# Altium PCB STM32_DAQ_Control_Board.PcbDoc (part 1 of 2)
Units mil, origin at the board's own origin, x right, y up, seen from the top; angles counter-clockwise.
Board outline 2345 x 2362.2 mil, 2 copper layers (Top Layer, Bottom Layer); 78 components, 52 nets, 252 pads, 148 vias.
Unrouted connection lines stored in the file: 1.
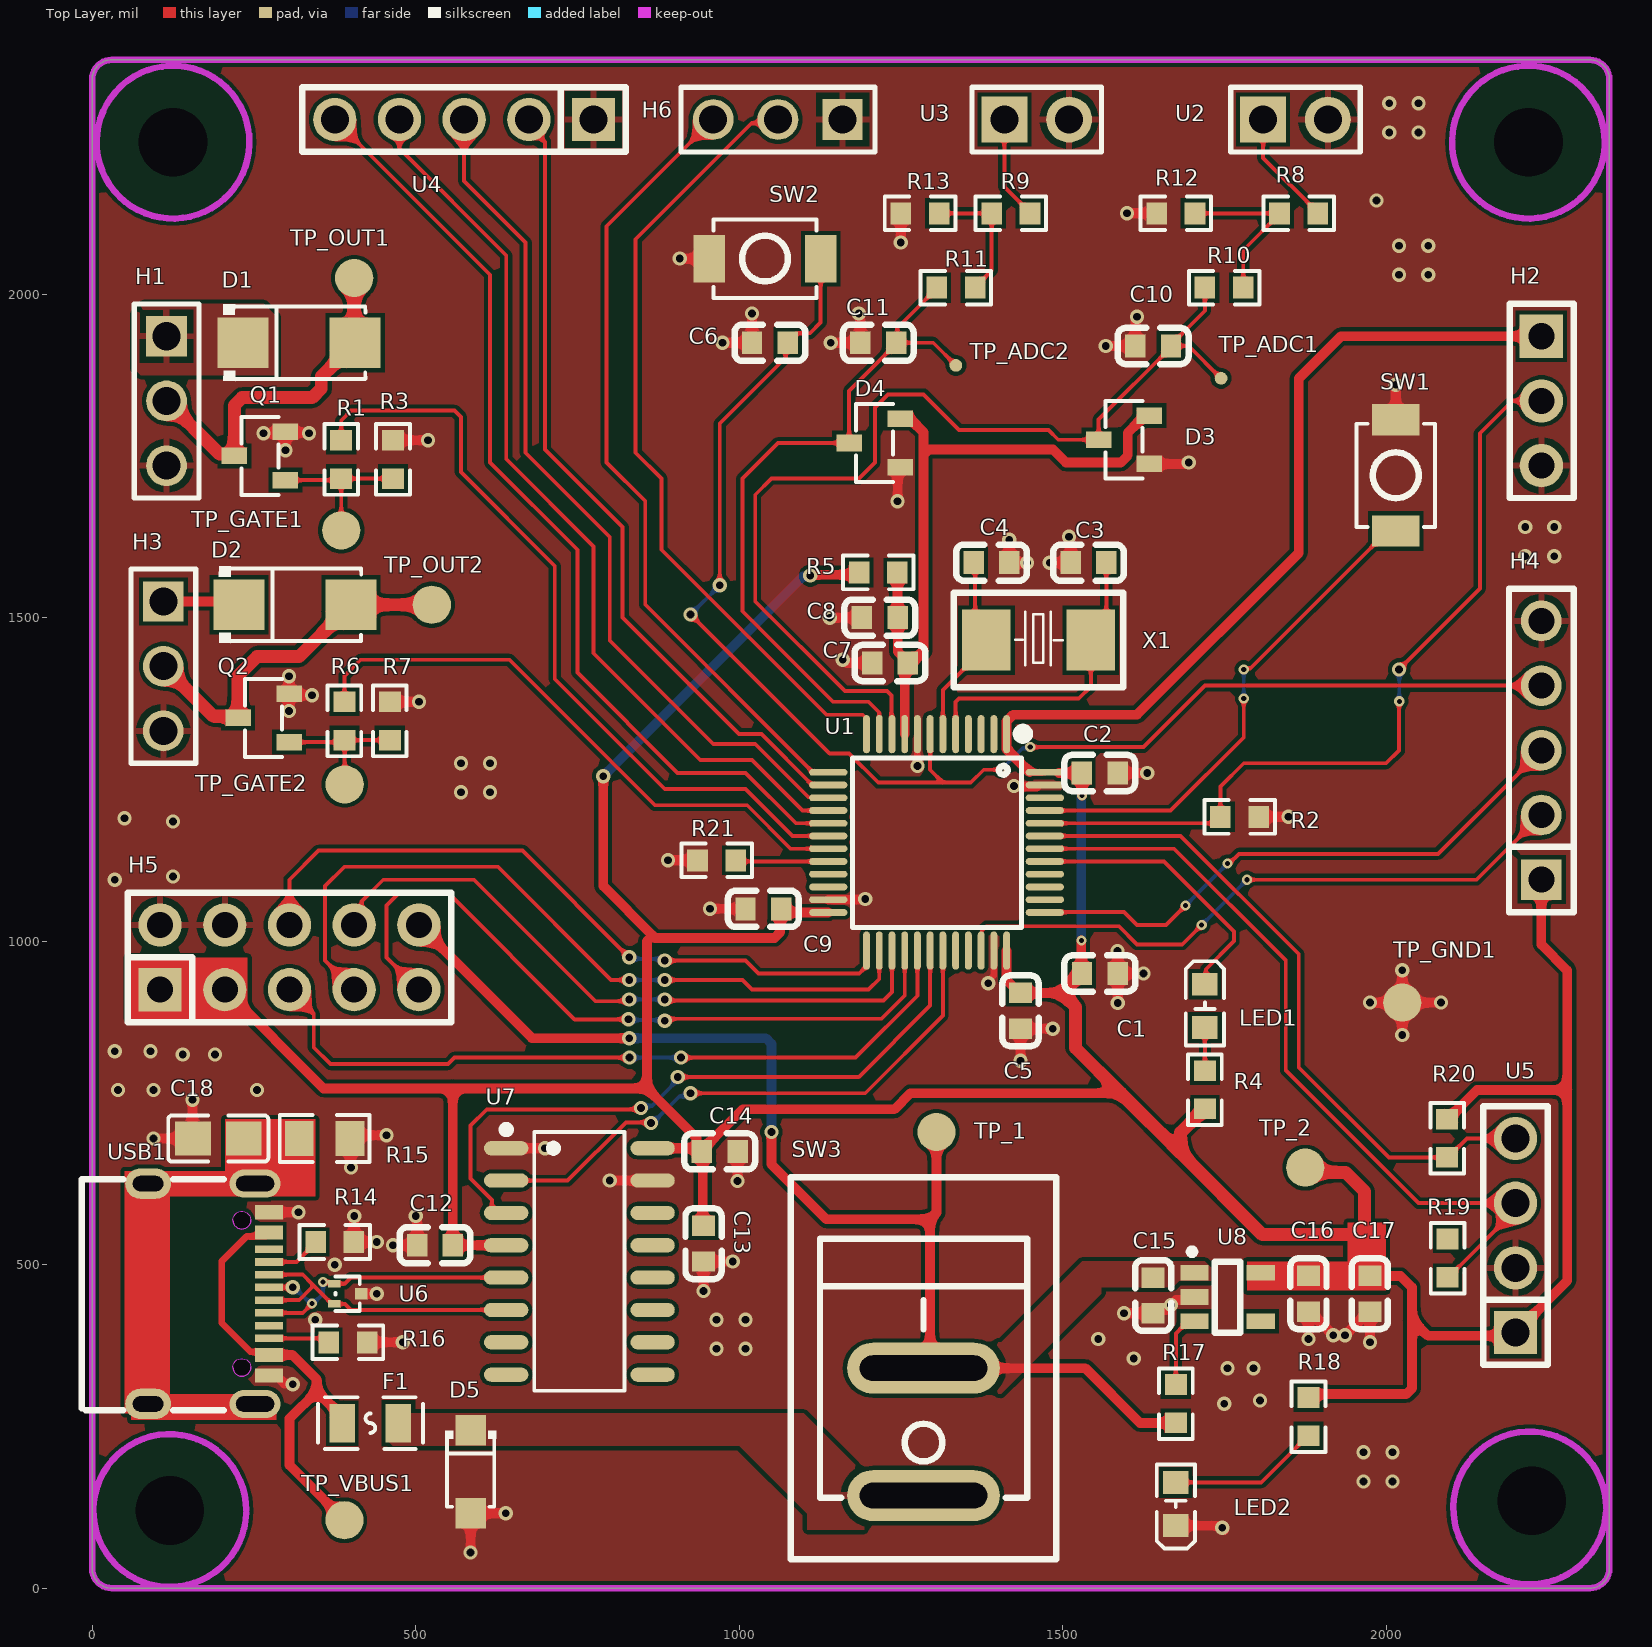
[diagram p0: Top Layer view]
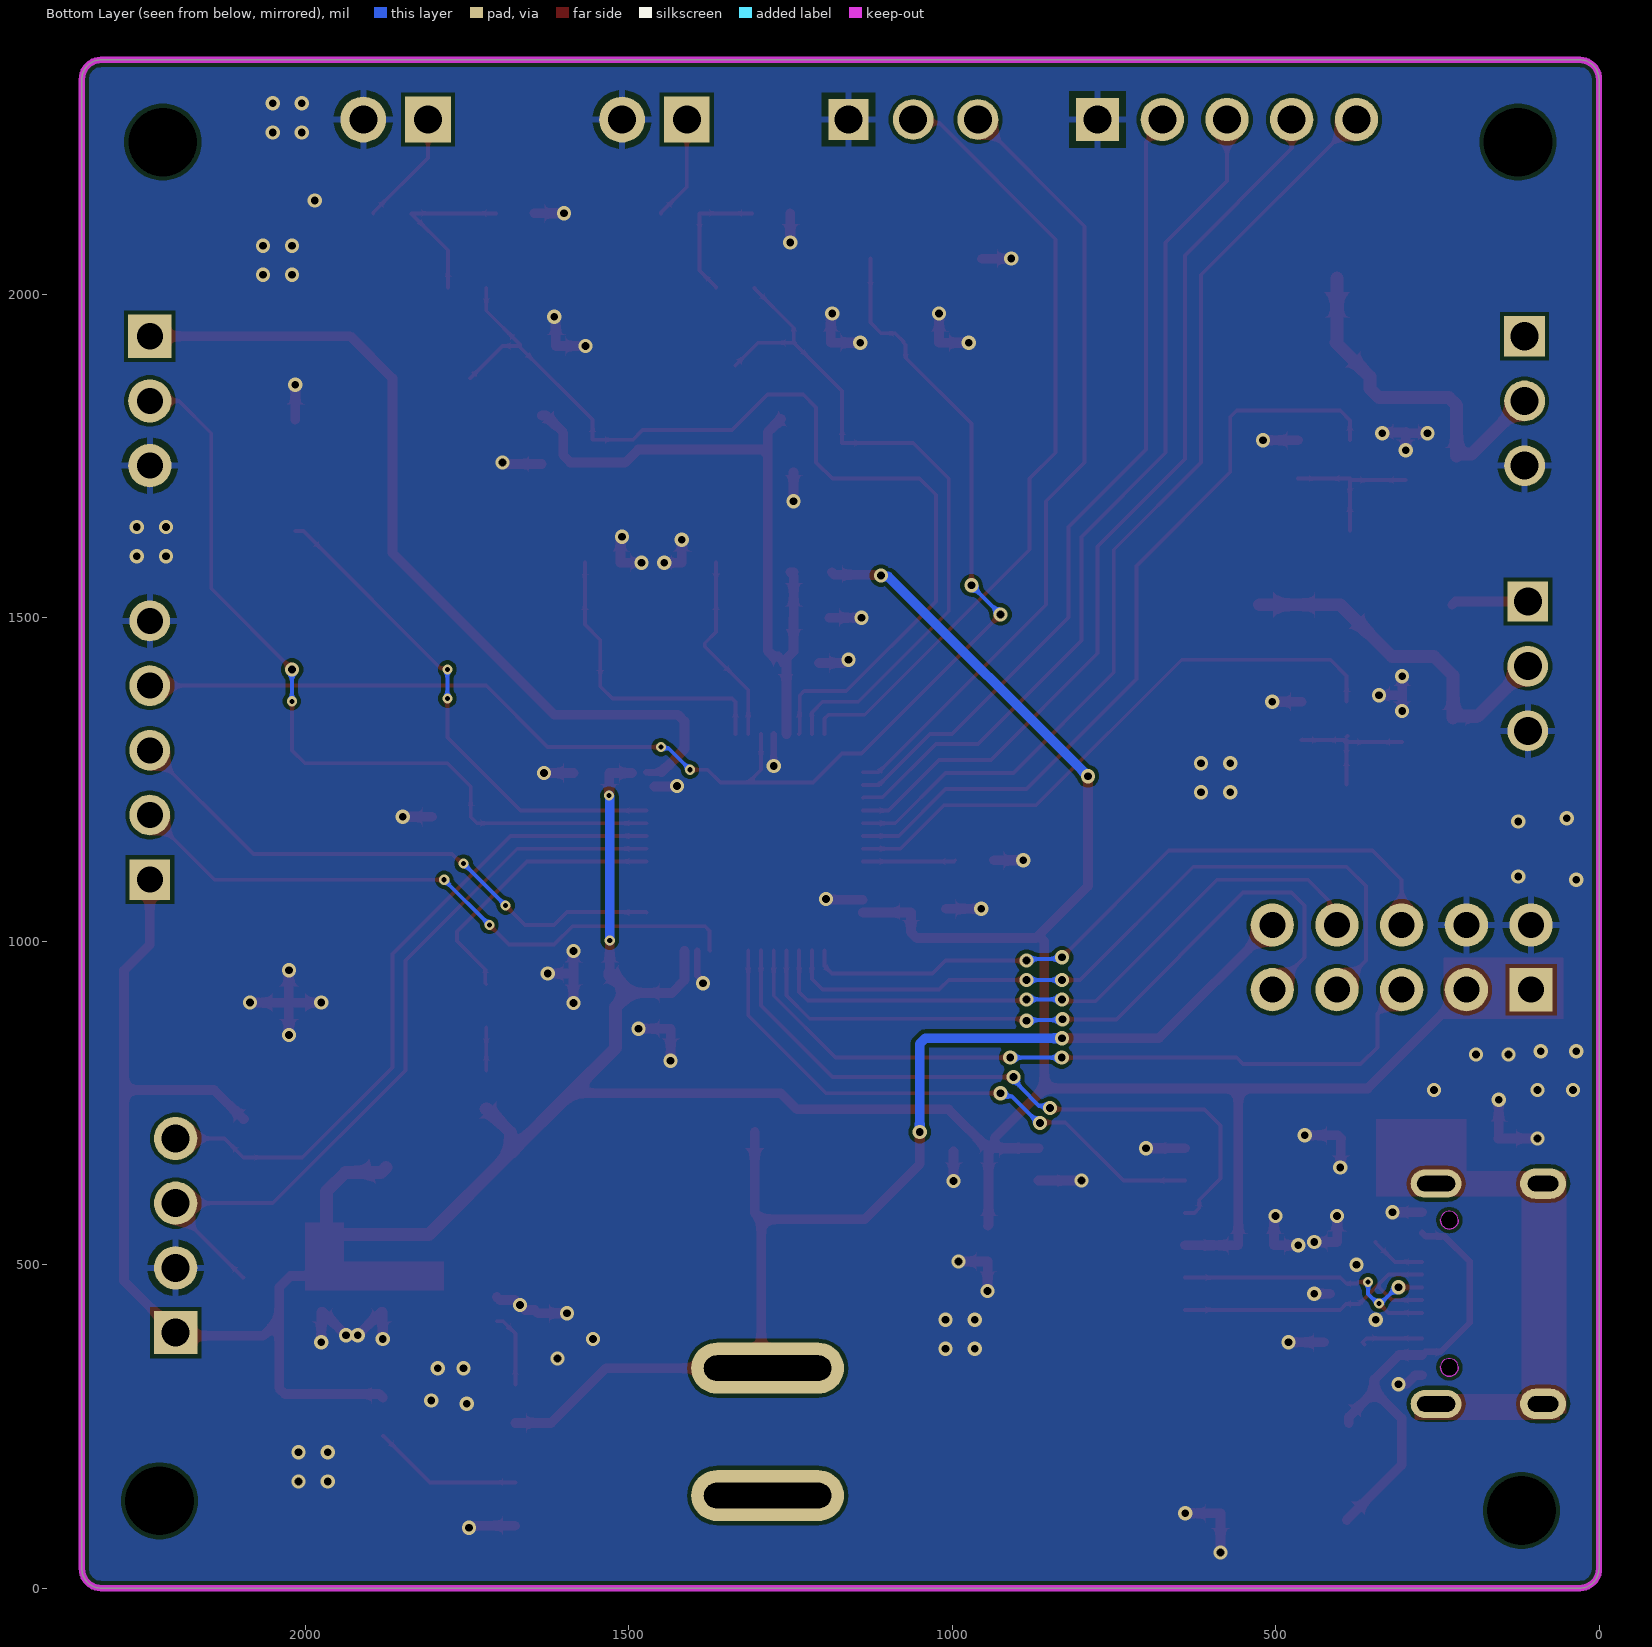
[diagram p1: Bottom Layer view, seen from below]

## Layer stack, top to bottom
Top Solder: solder mask 0.4, Solder Resist, Dk 3.5
Top Layer: signal copper 1.4
Dielectric 1: dielectric 12.6, FR-4, Dk 4.8
Bottom Layer: signal copper 1.4
Bottom Solder: solder mask 0.4, Solder Resist, Dk 3.5

## Board outline
0,30 0,2332.2 cw(c30,2332.2) 30,2362.2 2315,2362.2 cw(c2315,2332.2) 2345,2332.2 2345,30 cw(c2315,30) 2315,0 30,0 cw(c30,30)

## Design rules (kind name [scope] priority, off if disabled: settings)
Clearance [All] p1: gap=6 ignorepadtopadclearanceinfootprint=TRUE
HoleSize [All] p1: absolutevalues=TRUE maxlimit=196.85 minlimit=1 maxpercent=80.000 minpercent=20.000
NetAntennae [All] p1: netantennaetolerance=100
PlaneConnect [All] p1: planeconnectstyle=Direct reliefexpansion=20 reliefentries=4 reliefconductorwidth=10 reliefairgap=10
PolygonConnect [All] p1: thpad.connectstyle=Relief thpad.reliefconductorwidth=10 thpad.reliefentries=4 thpad.polygonreliefangle="90 Angle" thpad.airgapwidth=10 smdpad.connectstyle=Direct smdpad.reliefconductorwidth=10 smdpad.reliefentries=4 smdpad.polygonreliefangle="90 Angle" smdpad.airgapwidth=10 via.connectstyle=Direct via.reliefconductorwidth=10 via.reliefentries=4 via.polygonreliefangle="90 Angle" via.airgapwidth=10
RoutingVias [All] p1: holewidth=12 width=22 viastyle="Through Hole" minholewidth=7.87 minwidth=15.75 maxholewidth=196.85 maxwidth=196.85
SilkToSilkClearance [All] p1: silktosilkclearance=2
SilkToSolderMaskClearance [IsPad] p1: minsilkscreentomaskgap=2 clearancetoexposedcopper=TRUE
SolderMaskExpansion SolderMask_Via_Tented [IsVia] p1: expansion=4 istentingtop=TRUE
SolderMaskExpansion [All] p2: expansion=4 istentingtop=FALSE useseparateexpansions=TRUE expansionbottom=4 istentingbottom=FALSE
Width PWR [InNetClass('PWR')] p1: maxlimit=60 minlimit=15 preferedwidth=15
Width [All] p2: maxlimit=100 minlimit=5 preferedwidth=6 minimp=50.000000 maximp=50.000000 favimp=50.000000
25 further rules are at their usual default settings.

## Classes and differential pairs
net class PWR: 3.3V +5V_SYS SHIELD VBUS_FUSED VDDA_3V3 VLOAD_EXT1 VLOAD_EXT2

## Components (designator, comment, footprint, x,y, rotation, side; value= is the part's Value field where it differs from the comment)
C1 "4.7uf" C0603 1557.6,950 r180 top
C2 "100nF" C0603 1557.4,1260 r0 top
C3 "5.1pF" C0603 1540,1585 r0 top value=10pf
C4 "5.1pF" C0603 1390,1585 r180 top value=10pf
C5 "100nF" C0603 1435,892.4 r270 top
C6 "100nF" C0603 1047.6,1925 r0 top
C7 "100nf" C0603 1233.2,1430 r0 top
C8 "1uf" C0603 1217.4,1500 r0 top
C9 "100nF" C0603 1037.4,1050 r0 top
C10 "10nF" C0603 1640,1920 r0 top
C11 "10nF" C0603 1215,1925 r0 top
C12 "100nF" C0603 530,530 r0 top
C13 "1uf" C0603 945,532.4 r90 top
C14 "100nF" C0603 970,675 r180 top
C15 "1uf" C0603 1640,452.4 r270 top
C16 "1uf" C0603 1880,455 r270 top
C17 "4.7uf" C0603 1975,455 r270 top
C18 "1nF" C0805 195,695 r0 top
D1 "SS14" SMA_L4.3-W2.6-LS5.2-RD 320,1925 r0 top
D2 "SS14" SMA_L4.3-W2.6-LS5.2-RD 313.4,1520 r0 top
D3 "BAT54S" SOT-23-3_L2.9-W1.3-P1.90-LS2.4-BR 1595,1775 r0 top
D4 "BAT54S" SOT-23-3_L2.9-W1.3-P1.90-LS2.4-BR 1209.4,1770 r0 top
D5 "SMF5.0A" SOD-123FL_L2.7-W1.8-LS3.8-RD 585,180 r270 top
F1 "SMD0805-050-6" F0805 430,255 r180 top
H1 "2.54-1*3P针" HDR-TH_3P-P2.54-V-M-1 115,1835 r270 top
H2 "HX PZ2.54-1x3P ZZ" CONN-TH_HX-PZ2.54-1X3P-ZZ 2240,1835 r270 top
H3 "2.54-1*3P针" HDR-TH_3P-P2.54-V-M-1 110,1425 r270 top
H4 "PH2.54-1X5P-H25" HDR-TH_5P-P2.54-V-M-3 2240,1295 r90 top
H5 "PZ2.54-2X5P-H25" HDR-TH_10P-P2.54-V-M-R2-C5-S2.54_2 305,975 r0 top
H6 "2.54-1*3P针" HDR-TH_3P-P2.54-V-M-1 1060,2270 r180 top
LED1 "GL0603UR01" LED0603-FD 1720,900 r90 top
LED2 "GL0603UR01" LED0603-FD 1675,130 r270 top
Q1 "AO3400A" SOT-23-3_L2.9-W1.3-P1.90-LS2.4-BR 259.4,1750 r0 top
Q2 "AO3400A" SOT-23-3_L2.9-W1.3-P1.90-LS2.4-BR 265,1345 r0 top
R1 "100欧" R0603 385,1744.7 r270 top
R2 "10K" R0603 1773.57,1192.19 r0 top
R3 "100k" R0603 465,1744.7 r270 top
R4 "1k" R0603 1720,770.4 r270 top value=10K
R5 "0欧" R0603 1215,1570 r0 top
R6 "100欧" R0603 390,1340.4 r270 top
R7 "100k" R0603 460,1340.4 r270 top
R8 "12K" R0603 1865,2125 r180 top value=10K
R9 "12K" R0603 1420,2125 r180 top value=10K
R10 "330欧" R0603 1749.6,2010 r0 top
R11 "330欧" R0603 1335,2010 r0 top
R12 "18K" R0603 1675,2125 r180 top
R13 "18K" R0603 1279.7,2125 r180 top
R14 "5.1k" R0603 375,535 r180 top
R15 "1MΩ" R0805 359.4,695 r180 top
R16 "5.1k" R0603 395.4,380 r180 top
R17 "10K" R0603 1675,285 r90 top
R18 "1K" R0603 1880,265 r90 top
R19 "4.7k" R0603 2095,510 r90 top value=0欧
R20 "4.7k" R0603 2094.4,695.3 r90 top value=0欧
R21 "10K" R0603 965.3,1125 r0 top value=0欧
SW1 "TS-1088-AR02016" SW-SMD_L3.9-W3.0-P4.45 2015,1720 r90 top
SW2 "TS-1088-AR02016" SW-SMD_L3.9-W3.0-P4.45 1040,2055 r0 top
SW3 "RS601HL-1010011BB" SW-TH_RS601HL-1010011BB 1285,241.6 r90 top
TP_1 "" Test-Point-0.5mm#1 1305,705 r90 top
TP_2 "" Test-Point-0.5mm#1 1875,650 r90 top
TP_ADC1 "" Test-Point-0.5mm#2 1745,1870 r90 top
TP_ADC2 "" Test-Point-0.5mm#2 1335,1890 r90 top
TP_GATE1 "" Test-Point-0.5mm#1 385,1635 r90 top
TP_GATE2 "" Test-Point-0.5mm#1 390.34,1242.26 r90 top
TP_GND1 "" Test-Point-0.5mm#1 2025,905 r90 top
TP_OUT1 "" Test-Point-0.5mm#1 405,2025 r90 top
TP_OUT2 "" Test-Point-0.5mm#1 525,1520 r90 top
TP_VBUS1 "" Test-Point-0.5mm#1 390,105 r90 top
U1 "STM32F103C8T6" LQFP-48_L7.0-W7.0-P0.50-LS9.0-BL 1305.2,1152.7 r180 top
U2 "HX PZ2.54-1x2P ZZ" HDR-TH_2P-P2.54-V-M-3 1860,2270 r0 top
U3 "HX PZ2.54-1x2P ZZ" HDR-TH_2P-P2.54-V-M-3 1460,2270 r0 top
U4 "HX PZ2.54-1x5P" HDR-TH_5P-P2.54-V-M 575,2270 r180 top
U5 "HX PZ2.54-1x4P" HDR-TH_4P-P2.54-V-M 2200,545 r90 top
U6 "TPD2EUSB30DRTR-N" SOT-723_L1.2-W0.8-P0.40-LS1.2-BR 395,455 r180 top
U7 "CH340C" SOP-16_L10.0-W3.9-P1.27-LS6.0-BL 753.1,505 r270 top
U8 "AP2112K-3.3TRG1" SOT-25-5_L2.9-W1.6-P0.95-LS2.8-BL 1755,450 r270 top
USB1 "TYPE-C 16PIN 2MD(073)" USB-C-SMD_TYPE-C-16PIN-2MD-073 180,455 r270 top
X1 "8MHz" CRYSTAL-SMD_L5.0-W3.2 1462.98,1465.41 r180 top

## Footprints (in the part's own frame and the unit in brackets; to place one, negate y for a bottom-side part, rotate by r counter-clockwise, add the part's x,y. Pads: shape width x height; smd on the part's side, far side on the other; paste and mask are expansions set on the pad)
C0603 [mil]
  rect 31.5x35.4 smd: 1(-27.6,0) 2(27.6,0)
  silkscreen extent -55,-28 55,28
C0805 [mil]
  rect 55.5x53.1 smd paste-3937 mask+2: 1(-39.4,0) 2(39.3,0)
  silkscreen extent -77,-36 77,36
CONN-TH_HX-PZ2.54-1X3P-ZZ [mil]
  rect 66.9x66.9 hole 40.2: 1(-100,0)
  round 66.9 hole 40.2: 2(0,0) 3(100,0)
  silkscreen extent -150,-49 150,50
CRYSTAL-SMD_L5.0-W3.2 [mil]
  rect 74.8x94.5 smd: 1(-80.7,0) 2(80.7,0)
  silkscreen extent -131,-73 131,73
F0805 [mil]
  rect 39.4x59.1 smd paste-3937 mask+2: 1(-43.4,0) 2(43.3,0)
  silkscreen extent -81,-40 81,40
HDR-TH_2P-P2.54-V-M-3 [mil]
  rect 70.9x70.9 hole 43.3: 1(-50,0)
  round 70.9 hole 43.3: 2(50,0)
  silkscreen extent -100,-50 100,50
HDR-TH_3P-P2.54-V-M-1 [mil]
  rect 62x63 hole 43.3 paste-99999 mask+2: 1(-100,0)
  round 63 hole 43.3 paste-99999 mask+2: 2(0,0) 3(100,0)
  silkscreen extent -150,-50 150,50
HDR-TH_4P-P2.54-V-M [mil]
  rect 66.9x66.9 hole 43.3: 1(-150,0)
  round 66.9 hole 43.3: 2(-50,0) 3(50,0) 4(150,0)
  silkscreen extent -200,-50 200,50
HDR-TH_5P-P2.54-V-M [mil]
  rect 66.9x66.9 hole 43.3: 1(-200,0)
  round 66.9 hole 43.3: 2(-100,0) 3(0,0) 4(100,0) 5(200,0)
  silkscreen extent -250,-50 250,50
HDR-TH_5P-P2.54-V-M-3 [mil]
  rect 63x63 hole 40.2: 1(-200,0)
  round 63 hole 40.2: 2(-100,0) 3(0,0) 4(100,0) 5(200,0)
  silkscreen extent -250,-50 250,50
HDR-TH_10P-P2.54-V-M-R2-C5-S2.54_2 [mil]
  rect 66.9x66.9 hole 40.2: 1(-200,-50)
  round 66.9 hole 40.2: 2(-200,50) 3(-100,-50) 4(-100,50) 5(0,-50) 6(0,50) 7(100,-50) 8(100,50) 9(200,-50) 10(200,50)
  silkscreen extent -250,-100 250,100
LED0603-FD [mil]
  rect 35.4x39.4 smd: 1(-33.5,0) 2(33.4,0)
  silkscreen extent -61,-30 69,30
LQFP-48_L7.0-W7.0-P0.50-LS9.0-BL [mil]
  oval 10.6x59.1 smd paste+0 mask+2: 1(-108.2,-167.3) 2(-88.5,-167.3) 3(-68.9,-167.3) 4(-49.2,-167.3) 5(-29.5,-167.3) 6(-9.8,-167.3) 7(9.9,-167.3) 8(29.6,-167.3) 9(49.2,-167.3) 10(68.9,-167.3) 11(88.6,-167.3) 12(108.3,-167.3) 25(108.3,167.3) 26(88.6,167.3) 27(68.9,167.3) 28(49.2,167.3) 29(29.6,167.3) 30(9.9,167.3) 31(-9.8,167.3) 32(-29.5,167.3) 33(-49.2,167.3) 34(-68.9,167.3) 35(-88.5,167.3) 36(-108.2,167.3)
  oval 59.1x10.6 smd paste+0 mask+2: 13(167.4,-108.3) 14(167.4,-88.6) 15(167.4,-68.9) 16(167.4,-49.2) 17(167.4,-29.5) 18(167.4,-9.9) 19(167.4,9.8) 20(167.4,29.5) 21(167.4,49.2) 22(167.4,68.9) 23(167.4,88.6) 24(167.4,108.3) 37(-167.3,108.3) 38(-167.3,88.6) 39(-167.3,68.9) 40(-167.3,49.2) 41(-167.3,29.5) 42(-167.3,9.8) 43(-167.3,-9.9) 44(-167.3,-29.5) 45(-167.3,-49.2) 46(-167.3,-68.9) 47(-167.3,-88.6) 48(-167.3,-108.3)
  silkscreen extent -141,-176 130,132
R0603 [mil]
  rect 31.8x34 smd paste-3937 mask+2: 1(-29.6,0) 2(29.7,0)
  silkscreen extent -55,-26 55,26
R0805 [mil]
  rect 44.6x54.2 smd paste-3937 mask+2: 1(-39.3,0) 2(39.4,0)
  silkscreen extent -69,-36 69,36
SMA_L4.3-W2.6-LS5.2-RD [mil]
  rect 78.7x78.7 smd: 1(-86.6,0) 2(86.6,0)
  silkscreen extent -117,-59 102,59
SOD-123FL_L2.7-W1.8-LS3.8-RD [mil]
  rect 47.2x47.2 smd: 1(-64.3,0) 2(64.4,0)
  silkscreen extent -63,-39 54,39
SOP-16_L10.0-W3.9-P1.27-LS6.0-BL [mil]
  oval 22x68.7 smd: 1(-175,-113.1) 2(-125,-113.1) 3(-75,-113.1) 4(-25,-113.1) 5(25,-113.1) 6(75,-113.1) 7(125,-113.1) 8(175,-113.1) 9(175,113.1) 10(125,113.1) 11(75,113.1) 12(25,113.1) 13(-25,113.1) 14(-75,113.1) 15(-125,113.1) 16(-175,113.1)
  silkscreen extent -210,-119 200,70
SOT-23-3_L2.9-W1.3-P1.90-LS2.4-BR [mil]
  rect 39.4x25.6 smd: 1(39.3,-37.4) 2(39.3,37.4) 3(-39.4,0)
  silkscreen extent -29,-60 29,60
SOT-25-5_L2.9-W1.6-P0.95-LS2.8-BL [mil]
  rect 24.5x43.5 smd: 1(-37.4,-51.2) 2(0,-51.2) 3(37.4,-51.2) 4(37.4,51.2) 5(-37.4,51.2)
  silkscreen extent -75,-60 56,20
SOT-723_L1.2-W0.8-P0.40-LS1.2-BR [mil]
  rect 19.3x11.6 smd: 1(20.9,-15.7) 2(20.9,15.8)
  rect 19.3x17.1 smd: 3(-20.8,0)
  silkscreen extent -19,-27 19,27
SW-SMD_L3.9-W3.0-P4.45 [mil]
  rect 48.4x73.2 smd: 1(-86,0) 2(86,0)
  silkscreen extent -80,-61 80,61
SW-TH_RS601HL-1010011BB [mil]
  oval 78.7x236.2 hole 39.4 slot 196.8 at 90 deg paste-99999 mask+2: 1(-98.5,0) 2(98.4,0)
  silkscreen extent -197,-205 393,205
Test-Point-0.5mm#1 [mm]
  round 1.5 smd: 1(0,0)
Test-Point-0.5mm#2 [mm]
  round 0.5 smd: 1(0,0)
USB-C-SMD_TYPE-C-16PIN-2MD-073 [mil]
  oval 43.3x78.7 hole 23.6 slot 59.1 at 90 deg paste-99999 mask+2: 13(-170.3,71.8) 14(170.3,71.8)
  oval 47.2x70.9 hole 23.6 slot 47.2 at 90 deg paste-99999 mask+2: 13(-170.3,-93.5) 14(170.3,-93.5)
  rect 21.7x43.3 smd paste-3937 mask+2: A1B12(-126,93.5) A4B9(-94.5,93.5) B1A12(126,93.5) B4A9(94.5,93.5)
  rect 11.8x43.3 smd paste-3937 mask+2: A5(-49.2,93.5) A6(-9.8,93.5) A7(9.9,93.5) A8(49.2,93.5) B5(68.9,93.5) B6(29.5,93.5) B7(-29.5,93.5) B8(-68.9,93.5)
  Keep-Out Layer board cut-out: 127.6,51.3 127.2,48.2 126.1,45.2 124.4,42.5 122,40.3 119.3,38.7 116.2,37.8 113,37.6 109.8,38.1 106.9,39.4 104.3,41.3 102.3,43.8 100.9,46.6 100.1,49.7 100.1,52.9 100.9,56.1 102.3,58.9 104.3,61.4 106.9,63.3 109.8,64.5 113,65.1 116.2,64.9 119.3,64 122,62.4 124.4,60.2 126.1,57.5 127.2,54.5 127.6,51.3
  Keep-Out Layer board cut-out: -100,51.3 -100.4,48.2 -101.4,45.2 -103.2,42.5 -105.5,40.3 -108.3,38.7 -111.4,37.8 -114.6,37.6 -117.7,38.1 -120.6,39.4 -123.2,41.3 -125.3,43.8 -126.7,46.6 -127.4,49.7 -127.4,52.9 -126.7,56.1 -125.3,58.9 -123.2,61.4 -120.6,63.3 -117.7,64.5 -114.6,65.1 -111.4,64.9 -108.3,64 -105.5,62.4 -103.2,60.2 -101.4,57.5 -100.4,54.5 -100,51.3
  Keep-Out Layer region: 127.6,51.3 127.2,48.2 126.1,45.2 124.4,42.5 122,40.3 119.3,38.7 116.2,37.8 113,37.6 109.8,38.1 106.9,39.4 104.3,41.3 102.3,43.8 100.9,46.6 100.1,49.7 100.1,52.9 100.9,56.1 102.3,58.9 104.3,61.4 106.9,63.3 109.8,64.5 113,65.1 116.2,64.9 119.3,64 122,62.4 124.4,60.2 126.1,57.5 127.2,54.5 127.6,51.3
  Keep-Out Layer region: 127.6,51.3 127.2,48.2 126.1,45.2 124.4,42.5 122,40.3 119.3,38.7 116.2,37.8 113,37.6 109.8,38.1 106.9,39.4 104.3,41.3 102.3,43.8 100.9,46.6 100.1,49.7 100.1,52.9 100.9,56.1 102.3,58.9 104.3,61.4 106.9,63.3 109.8,64.5 113,65.1 116.2,64.9 119.3,64 122,62.4 124.4,60.2 126.1,57.5 127.2,54.5 127.6,51.3
  Keep-Out Layer region: -100,51.3 -100.4,48.2 -101.4,45.2 -103.2,42.5 -105.5,40.3 -108.3,38.7 -111.4,37.8 -114.6,37.6 -117.7,38.1 -120.6,39.4 -123.2,41.3 -125.3,43.8 -126.7,46.6 -127.4,49.7 -127.4,52.9 -126.7,56.1 -125.3,58.9 -123.2,61.4 -120.6,63.3 -117.7,64.5 -114.6,65.1 -111.4,64.9 -108.3,64 -105.5,62.4 -103.2,60.2 -101.4,57.5 -100.4,54.5 -100,51.3
  Keep-Out Layer region: -100,51.3 -100.4,48.2 -101.4,45.2 -103.2,42.5 -105.5,40.3 -108.3,38.7 -111.4,37.8 -114.6,37.6 -117.7,38.1 -120.6,39.4 -123.2,41.3 -125.3,43.8 -126.7,46.6 -127.4,49.7 -127.4,52.9 -126.7,56.1 -125.3,58.9 -123.2,61.4 -120.6,63.3 -117.7,64.5 -114.6,65.1 -111.4,64.9 -108.3,64 -105.5,62.4 -103.2,60.2 -101.4,57.5 -100.4,54.5 -100,51.3
  Keep-Out Layer lines w0.1: 113,37.6 109.8,38.1 106.9,39.4 104.3,41.3 102.3,43.8 100.9,46.6 100.1,49.7 100.1,52.9 100.9,56.1 102.3,58.9 104.3,61.4 106.9,63.3 109.8,64.5 113,65.1 116.2,64.9 119.3,64 122,62.4 124.4,60.2 126.1,57.5 127.2,54.5 127.6,51.3 127.2,48.2 126.1,45.2 124.4,42.5 122,40.3 119.3,38.7 116.2,37.8 113,37.6 ; -114.6,37.6 -117.7,38.1 -120.6,39.4 -123.2,41.3 -125.3,43.8 -126.7,46.6 -127.4,49.7 -127.4,52.9 -126.7,56.1 -125.3,58.9 -123.2,61.4 -120.6,63.3 -117.7,64.5 -114.6,65.1 -111.4,64.9 -108.3,64 -105.5,62.4 -103.2,60.2 -101.4,57.5 -100.4,54.5 -100,51.3 -100.4,48.2 -101.4,45.2 -103.2,42.5 -105.5,40.3 -108.3,38.7 -111.4,37.8 -114.6,37.6
  silkscreen extent -177,-196 180,24

## Part data
C1 C2 C3 C4 C5 C6 C7 C8 C9 C10 C11 C12 C13 C14 C15 C16 C17: library part CAP_0603, AddInBom=yes, ConvertToPcb=yes, Device=CAP_0603, FootprintName=C0603, ModelName=C0603_L1.6-W0.8-H0.8, Supplier Footprint=0603, Symbol=Capacitance
  C1 C2 C3 C4 C5 C6 C7 C8 C9 C15 C16 C17: ModelId=ac125912035d415993ca9572d50418b1聨0819f05c4eef4c71ace90d822a990e87, ModelTransform=62.992,31.496,0,0,0,0,0,0,0
  C10 C11 C12 C13 C14: 3D Model=ac125912035d415993ca9572d50418b1聨0819f05c4eef4c71ace90d822a990e87, 3D Model Transform=62.992,31.496,0,0,0,0,0,0,0
C18: library part FCC0805B102K102FT, "容值:1nF;精度:±10%;额定电压:1kV;温度系数:X7R;", JLCPCB Part Class="Extended Part", LCSC Part Name="1nF ±10% 1kV", Manufacturer=FOJAN(富捷), Temperature Coefficient=X7R, Tolerance=±10%, Voltage Rating=1kV, AddInBom=yes, ConvertToPcb=yes, Datasheet=https://item.szlcsc.com/datasheet/FCC0805B102K102FT/5747097.html, Device=FCC0805B102K102FT, FootprintName=C0805, ManufacturerPart=FCC0805B102K102FT, ModelId=1ba041120af144c991958decab20d241聨0819f05c4eef4c71ace90d822a990e87, ModelName=C0805_L2.0-W1.3-H1.3, ModelTransform=78.74,51.181,0,0,0,0,0,0.0005,0, Supplier=LCSC, Supplier Footprint=0805, SupplierPart=C5137645, Symbol=FCC0805B102K102FT
D1 D2: library part SS14_C83852, "正向压降(Vf):500mV@1A;直流反向耐压(Vr):40V;整流电流:1A;", Current - Rectified=1A, JLCPCB Part Class="Extended Part", LCSC Part Name="电压:40V 电流:1A", Manufacturer=onsemi(安森美), Non-Repetitive Peak Forward Surge Current=40A, Operating Junction Temperature Range=-65℃~+125℃, Reverse Leakage Current (Ir)=200uA@40V, Voltage - DC Reverse(Vr)=40V, Voltage - Forward(Vf@If)=500mV@1A, AddInBom=yes, ConvertToPcb=yes, Datasheet=https://item.szlcsc.com/datasheet/SS14/85019.html, Device=SS14_C83852, FootprintName=SMA_L4.3-W2.6-LS5.2-RD, ManufacturerPart=SS14, ModelId=e3551acb3c5a4975a5e9d36087fe1fa2聨0819f05c4eef4c71ace90d822a990e87, ModelName=SMA_L4.3-W2.6-LS5.2-RD, ModelTransform=185.039,102.362,0,0,0,0,0,0,0, Supplier=LCSC, Supplier Footprint=SMA(DO-214AC), SupplierPart=C83852, Symbol=SS14_C83852
D3 D4: library part BAT54S_C7420333, "二极管配置:1对串联式;正向压降(Vf):400mV@10mA;直流反向耐压(Vr):30V;整流电流:200mA;", Current - Rectified=200mA, JLCPCB Part Class="Extended Part", LCSC Part Name="电压:30V 电流:200mA", Manufacturer=R+O(宏嘉诚), Non-Repetitive Peak Forward Surge Current=600mA, Reverse Leakage Current (Ir)=2uA@30V, Voltage - DC Reverse(Vr)=30V, Voltage - Forward(Vf@If)=400mV@10mA, AddInBom=yes, ConvertToPcb=yes, Datasheet=https://item.szlcsc.com/datasheet/BAT54S/8397155.html, Device=BAT54S_C7420333, Diode Configuration=1对串联式, FootprintName=SOT-23-3_L2.9-W1.3-P1.90-LS2.4-BR, ManufacturerPart=BAT54S, ModelId=c62791f0466c4ae2a892c056b845b0ca聨0819f05c4eef4c71ace90d822a990e87, ModelName=SOT-23-3P_L2.9-W1.3-H1.0-LS2.4-P0.95, ModelTransform=98.425,114.173,0,180,0,0,0.0005,-0.0005,0, Supplier=LCSC, Supplier Footprint=SOT-23, SupplierPart=C7420333, Symbol=BAT54S_C7420333
D5: library part SMF5.0A_C19077497, "极性:单向;反向截止电压(Vrwm):5V;钳位电压:9.2V;峰值脉冲电流(Ipp):21.7A@10/1000us;峰值脉冲功率(Ppp):200W@10/1000us;击穿电压:7V;", Clamping Voltage=9.2V, JLCPCB Part Class="Extended Part", Junction Capacitance=-, LCSC Part Name="单向TVS 5V截止 峰值浪涌电流：21.7A@10/1000us", Manufacturer=R+O(宏嘉诚), Operating Temperature=-55℃~+150℃, Peak Pulse Current (Ipp)=21.7A@10/1000us, Peak Pulse Power Dissipation (Ppp)=200W@10/1000us, Reverse Leakage Current (Ir)=400uA, Reverse Stand-Off Voltage (Vrwm)=5V, Voltage - Breakdown=7V, AddInBom=yes, ConvertToPcb=yes, Datasheet=https://item.szlcsc.com/datasheet/SMF5.0A/20275582.html, Device=SMF5.0A_C19077497, FootprintName=SOD-123FL_L2.7-W1.8-LS3.8-RD, level of protection="IEC 61000-4-2", ManufacturerPart=SMF5.0A, ModelId=86f9151e155e4fe2af0c4f2e0a80302e聨0819f05c4eef4c71ace90d822a990e87, ModelName=SOD-123FL_L2.8-W1.8-H1.1-LS3.6, ModelTransform=141.732,70.866,0,180,0,0,0,0,0, Number of Channels=单路, Polarity=单向, Supplier=LCSC, Supplier Footprint=SOD-123FL, SupplierPart=C19077497, Symbol=SMF5.0A_C19077497, Type=TVS
F1: "耐压(Vmax):6V;最大电流(Imax):40A;保持电流(Ihold):500mA;跳闸电流(Itrip):1A;", Current - Max=40A, Hold Current=500mA, JLCPCB Part Class="Extended Part", LCSC Part Name="6V 500mA", Manufacturer=R+O(宏嘉诚), Operating Temperature=-40℃~+85℃, Power Dissipation=500mW, Resistance - Initial (Ri) (Min)=100mΩ, Resistance - Post Trip (R1) (Max)=850mΩ, Trip Current=1A, Voltage - Max=6V, AddInBom=yes, ConvertToPcb=yes, Datasheet=https://item.szlcsc.com/datasheet/SMD0805-050-6/48798689.html, Device=SMD0805-050-6, FootprintName=F0805, Height=0.8mm, Length=2.2mm, ManufacturerPart=SMD0805-050-6, ModelId=57e2aa106f9143e8b6ab832aebb31c78聨0819f05c4eef4c71ace90d822a990e87, ModelName=F0805_L2.1-W1.4-H0.8, ModelTransform=82.677,55.118,0,0,0,0,0.0005,0,0, Supplier=LCSC, Supplier Footprint=0805, SupplierPart=C46640983, Symbol=SMD0805-050-6, Time to Trip(Max)=100ms, Width=1.5mm
H1 H3 H6: "插针结构:1x3P;间距:2.54mm;行距:-;圆针/方针:方针;安装方式:直插;排数:单排;总PIN位数:3P;额定电流:3A;额定电压:-;配合针长度:6mm;塑高:2.5mm;端接针长度:3mm;触头材质:黄铜;触头镀层:金;工作温度:-40℃~+105℃;颜色:黑色;", Color=黑色, Current Rating=3A, JLCPCB Part Class="Extended Part", LCSC Part Name="1x3P 间距:2.54mm 方针 直插", Manufacturer=BOOMELE(博穆精密), Operating Temperature=-40℃~+105℃, Voltage Rating (Max)=-, AddInBom=yes, Circluar Pins/Square Pins=方针, Contact Material=黄铜, Contact Plating=金, ConvertToPcb=yes, Datasheet=https://item.szlcsc.com/datasheet/2.54-1*3P%25E9%2592%2588/50265.html, Device=2.54-1*3P针, FootprintName=HDR-TH_3P-P2.54-V-M-1, Insulation Height=2.5mm, Length of End Connection Pin=3mm, Length of Mating Pin=6mm, ManufacturerPart=2.54-1*3P针, ModelId=94a8ffe137b6410295cb18cd3ffd99db聨0819f05c4eef4c71ace90d822a990e87, ModelName=HDR-M-2.54_1x3, ModelTransform=299.9994,100,0,0,0,0,0,0,-118.11, Mounting Type=直插, Number of Pins=3P, Number of Rows=单排, Pin Structure=1x3P, Pitch=2.54mm, Row Spacing=-, Supplier=LCSC, Supplier Footprint=插件,P=2.54mm, SupplierPart=C49257, Symbol=Header-Male-2.54_1x3
H2: "插针结构:1x3P;间距:2.54mm;行距:-;圆针/方针:方针;安装方式:直插;排数:单排;总PIN位数:3P;额定电流:3A;额定电压:1kV;配合针长度:6mm;塑高:2.5mm;端接针长度:3mm;触头材质:黄铜;触头镀层:金;工作温度:-40℃~+105℃;颜色:黑色;", Color=黑色, Current Rating=3A, JLCPCB Part Class="Extended Part", LCSC Part Name="1x3P 间距:2.54mm 方针 直插", Manufacturer=hanxia(韩下), Operating Temperature=-40℃~+105℃, Voltage Rating (Max)=1kV, AddInBom=yes, Circluar Pins/Square Pins=方针, Contact Material=黄铜, Contact Plating=金, ConvertToPcb=yes, Datasheet=https://item.szlcsc.com/datasheet/HX%2520PZ2.54-1x3P%2520ZZ/34444549.html, Device="HX PZ2.54-1x3P ZZ", FootprintName=CONN-TH_HX-PZ2.54-1X3P-ZZ, Insulation Height=2.5mm, Length of End Connection Pin=3mm, Length of Mating Pin=6mm, ManufacturerPart="HX PZ2.54-1x3P ZZ", ModelId=d100cf23e3504114ab0fced37a4e4a82聨0819f05c4eef4c71ace90d822a990e87, ModelName=CONN-TH_HX-PZ2.54-1X3P-ZZ, ModelTransform=292.5191,98.425,0,0,0,0,0,0,-118.11, Mounting Type=直插, Number of Pins=3P, Number of Rows=单排, Pin Structure=1x3P, Pitch=2.54mm, Row Spacing=-, Supplementary Features=-, Supplier=LCSC, Supplier Footprint=插件,P=2.54mm, SupplierPart=C32713269, Symbol="HX PZ2.54-1X3P ZZ"
H4: "插针结构:1x5P;间距:2.54mm;行距:-;圆针/方针:方针;安装方式:直插;排数:单排;总PIN位数:5P;额定电流:3A;额定电压:-;配合针长度:6mm;塑高:2.5mm;端接针长度:3mm;触头材质:黄铜;触头镀层:金;工作温度:-40℃~+105℃;颜色:黑色;", Color=黑色, Current Rating=3A, JLCPCB Part Class="Extended Part", LCSC Part Name="1x5P 间距:2.54mm 方针 直插", Manufacturer=JXTCONN(聚兴泰), Operating Temperature=-40℃~+105℃, Voltage Rating (Max)=-, AddInBom=yes, Circluar Pins/Square Pins=方针, Contact Material=黄铜, Contact Plating=金, ConvertToPcb=yes, Datasheet=https://item.szlcsc.com/datasheet/PH2.54-1X5P-H25/44458965.html, Device=PH2.54-1X5P-H25, FootprintName=HDR-TH_5P-P2.54-V-M-3, Insulation Height=2.5mm, Length of End Connection Pin=3mm, Length of Mating Pin=6mm, ManufacturerPart=PH2.54-1X5P-H25, ModelId=70c2fce3a47c4ce6bc0418a805e76a28聨0819f05c4eef4c71ace90d822a990e87, ModelName=HDR-TH_5P-P2.54-V-M-3, ModelTransform=500.3927,98.425,0,0,0,0,0,0,-118.11, Mounting Type=直插, Number of Pins=5P, Number of Rows=单排, Pin Structure=1x5P, Pitch=2.54mm, Row Spacing=-, Supplier=LCSC, Supplier Footprint=插件,P=2.54mm, SupplierPart=C42431835, Symbol=PH2.54-1X5P-H25
H5: "插针结构:2x5P;间距:2.54mm;行距:2.54mm;圆针/方针:方针;安装方式:直插;排数:双排;总PIN位数:10P;额定电流:3A;额定电压:-;配合针长度:6mm;塑高:2.5mm;端接针长度:3mm;触头材质:黄铜;触头镀层:金;工作温度:-40℃~+105℃;颜色:黑色;", Color=黑色, Current Rating=3A, JLCPCB Part Class="Extended Part", LCSC Part Name="2x5P 间距:2.54mm 方针 直插", Manufacturer=JXTCONN(聚兴泰), Operating Temperature=-40℃~+105℃, Voltage Rating (Max)=-, AddInBom=yes, Circluar Pins/Square Pins=方针, Contact Material=黄铜, Contact Plating=金, ConvertToPcb=yes, Datasheet=https://item.szlcsc.com/datasheet/PZ2.54-2X5P-H25/44458948.html, Device=PZ2.54-2X5P-H25, FootprintName=HDR-TH_10P-P2.54-V-M-R2-C5-S2.54_2, Insulation Height=2.5mm, Length of End Connection Pin=3mm, Length of Mating Pin=6mm, ManufacturerPart=PZ2.54-2X5P-H25, ModelId=06d0967b89884158823d1be712bed3d1聨0819f05c4eef4c71ace90d822a990e87, ModelName=HDR-TH_10P-P2.54-V-M-R2-C5-S2.54_2, ModelTransform=500.393,200,0,0,0,0,0,0,-196.85, Mounting Type=直插, Number of Pins=10P, Number of Rows=双排, Pin Structure=2x5P, Pitch=2.54mm, Row Spacing=2.54mm, Supplier=LCSC, Supplier Footprint=插件,P=2.54mm, SupplierPart=C42431818, Symbol=PZ2.54-2X5P-H25
LED1 LED2: "灯头类型:-;发光颜色:红色;正向压降(Vf):2.4V;功率:-;正向电流:20mA;波长:620nm~625nm;二极管配置:独立二极管;透镜颜色:无色透明透镜;色温:-;发光强度:120mcd;发光角度:120°;载带方式:正贴;工作温度:-40℃~+85℃;", Color Temperature=-, Forward Current=20mA, Illumination Color=红色, JLCPCB Part Class="Extended Part", LCSC Part Name="0603 红灯 高亮", Lens Color=无色透明透镜, Manufacturer="Guiguang light(桂光光电)", Operating Temperature=-40℃~+85℃, Voltage - Forward(Vf)=2.4V, AddInBom=yes, ConvertToPcb=yes, Datasheet=https://item.szlcsc.com/datasheet/GL0603UR01/54645988.html, Device=GL0603UR01, Diode Configuration=独立二极管, FootprintName=LED0603-FD, Lamp Holder Type=-, Luminous Intensity=120mcd, ManufacturerPart=GL0603UR01, ModelId=b57d6965da4c4e30afc1a994a1f136ae聨0819f05c4eef4c71ace90d822a990e87, ModelName=LED0603_Inf, ModelTransform=60,30,0,0,0,0,0,0,0, Mounting Style=正贴, Peak Wavelength=-, Power(Watts)=-, Supplier=LCSC, Supplier Footprint=0603, SupplierPart=C51933292, Symbol=GL0603UR01, Viewing Angle=120°, Wavelength - Dominant=620nm~625nm
Q1 Q2: library part AO3400A_C20917, "数量:-;漏源电压(Vdss):30V;连续漏极电流(Id):-;导通电阻(RDS(on)):48mΩ@2.5V;耗散功率(Pd):-;阈值电压(Vgs(th)):1.45V@250uA;", Current - Continuous Drain(Id)=-, Drain to Source Voltage=30V, Gate Threshold Voltage (Vgs(th))=1.45V@250uA, Input Capacitance(Ciss)=630pF@15V, JLCPCB Part Class="Basic Part", LCSC Part Name="1个N沟道 耐压:30V 电流:5.7A", Manufacturer=AOS, Operating Temperature=-55℃~+150℃@(Tj), AddInBom=yes, Configuration=-, ConvertToPcb=yes, Datasheet=https://item.szlcsc.com/datasheet/AO3400A/21629.html, Device=AO3400A_C20917, FootprintName=SOT-23-3_L2.9-W1.3-P1.90-LS2.4-BR, Gate Charge(Qg)=7nC@10V, ManufacturerPart=AO3400A, ModelId=c62791f0466c4ae2a892c056b845b0ca聨0819f05c4eef4c71ace90d822a990e87, ModelName=SOT-23-3P_L2.9-W1.3-H1.0-LS2.4-P0.95, ModelTransform=98.425,114.173,0,180,0,0,0.0005,-0.0005,0, Number=-, Output Capacitance(Coss)=-, Pd - Power Dissipation=-, RDS(on)=48mΩ@2.5V, Reverse Transfer Capacitance (Crss@Vds)=-, Supplier=LCSC, Supplier Footprint=SOT-23-3L, SupplierPart=C20917, Symbol=AO3400A, Type=N沟道
R1 R2 R3 R5 R6 R7 R8 R9 R10 R11 R12 R13 R14 R16 R17 R18 R19 R20 R21: library part Res_0603, AddInBom=yes, ConvertToPcb=yes, Device=Res_0603, FootprintName=R0603, ModelName=R0603, Supplier Footprint=0603, Symbol=电阻
  R1 R3 R6 R7 R8 R9 R10 R11 R12 R13: 3D Model=fc143cca1e79419f9cd78b61e9279f08聨0819f05c4eef4c71ace90d822a990e87, 3D Model Transform=31.8897,63.7794,0,90,0,0,0,0,0
  R2 R5 R14 R16 R17 R18 R19 R20 R21: ModelId=fc143cca1e79419f9cd78b61e9279f08聨0819f05c4eef4c71ace90d822a990e87, ModelTransform=31.8897,63.7794,0,90,0,0,0,0,0
R4: library part Res_0603_1, AddInBom=yes, ConvertToPcb=yes, Device=Res_0603, FootprintName=R0603, ModelId=fc143cca1e79419f9cd78b61e9279f08聨0819f05c4eef4c71ace90d822a990e87, ModelName=R0603, ModelTransform=31.8897,63.7794,0,90,0,0,0,0,0, Supplier Footprint=0603, Symbol=电阻
R15: library part FRC0805F1004TS, "电阻类型:厚膜电阻;阻值:1MΩ;精度:±1%;功率:125mW;工作电压:150V;温度系数:±100ppm/℃;", JLCPCB Part Class="Extended Part", LCSC Part Name="1MΩ ±1% 125mW 厚膜电阻", Manufacturer=FOJAN(富捷), Operating Temperature=-55℃~+155℃, Power(Watts)=125mW, Temperature Coefficient=±100ppm/℃, Tolerance=±1%, Voltage-Supply(Max)=150V, AddInBom=yes, ConvertToPcb=yes, Device=FRC0805F1004TS, FootprintName=R0805, ManufacturerPart=FRC0805F1004TS, ModelId=37a81e68749a4138bd2dfa6897b24b85聨0819f05c4eef4c71ace90d822a990e87, ModelName=R0805_L2.0-W1.3-H0.6, ModelTransform=78.74,51.181,0,0,0,0,0,-0.0005,0, Supplier=LCSC, Supplier Footprint=0805, SupplierPart=C2933280, Symbol=FRC0805F1004TS, Type=厚膜电阻
SW1 SW2: "电路结构:单刀单掷;按钮形状:圆形按钮;作用力:1.6N;安装方式:立贴;开关长度:3.9mm;开关宽度:3mm;开关高度:2mm;带支架:不带支架;触点电流:50mA;额定电压:12V;带灯:-;工作寿命:10万次;", Actuator/Cap Color=黑色, Contact Current=50mA, IP Rating=-, JLCPCB Part Class="Basic Part", LCSC Part Name="3.9*3*2mm 立贴 轻触开关", Manufacturer=XUNPU(讯普), Operating Force=1.6N, Operating Temperature=-30℃~+80℃, Voltage Rating=12V, Actuator Style=圆形按钮, AddInBom=yes, Circuit=单刀单掷, ConvertToPcb=yes, Datasheet=https://item.szlcsc.com/datasheet/TS-1088-AR02016/763484.html, Device=TS-1088-AR02016, FootprintName=SW-SMD_L3.9-W3.0-P4.45, Length=3.9mm, Life=10万次, ManufacturerPart=TS-1088-AR02016, ModelId=b26698b69f274ffabef8a26c7d0e5dd1聨0819f05c4eef4c71ace90d822a990e87, ModelName=SW-SMD_L3.9-W2.9-H2.0-LS4.8, ModelTransform=188.976,114.174,0,0,0,0,0,0,0, Mounting Type=立贴, Supplier=LCSC, Supplier Footprint=SMD,4x3mm, SupplierPart=C720477, Switch Height=2mm, Symbol=TS-1088-AR02016, Termination Style=SMD接片, Width=3mm, with Bracket=不带支架, With Lamp=-
SW3: "带灯:无;引脚样式:焊片;额定电流:3A;额定电压(AC):250V;额定电压(DC):-;电路结构:单刀单掷;工作寿命:1万次;", Actuator Color=黑色, Current Rating=3A, JLCPCB Part Class="Extended Part", Manufacturer=HCTL(华灿天禄), Operating Temperature=-25℃~+85℃, Voltage Rating (AC)=250V, Voltage Rating (DC)=-, Actuator Identifier="- O", Actuator Type=凹面弯曲, AddInBom=yes, Circuit=单刀单掷, ConvertToPcb=yes, Datasheet=https://item.szlcsc.com/datasheet/RS601HL-1010011BB/3096684.html, Device=RS601HL-1010011BB, FootprintName=SW-TH_RS601HL-1010011BB, LCSC Part Name=RS601HL-1010011BB, Length=15mm, Life=1万次, ManufacturerPart=RS601HL-1010011BB, ModelId=cac6664e7827407e8024fa0ea95caa3c聨0819f05c4eef4c71ace90d822a990e87, ModelName=SW-TH_RS601HL-1010011BB, ModelTransform=590.55,413.385,0,0,0,0,97.83,0,-196.85, Supplier=LCSC, Supplier Footprint=插件,15x10.5mm, SupplierPart=C2885782, Switch Height=-, Symbol=RS601HL-1010011BB, Termination Style=焊片, Width=10.5mm, With Lamp=无
TP_1 TP_2 TP_ADC1 TP_ADC2 TP_GATE1 TP_GATE2 TP_GND1 TP_OUT1 TP_OUT2 TP_VBUS1: library part Test-Point, "Test Point 测试点", AddInBom=yes, ConvertToPcb=yes, Device=Test-Point, FootprintName=Test-Point-0.5mm, Symbol=Test-Point
U1: "CPU内核:ARM-M3;CPU最大主频:72MHz;应用领域:-;", JLCPCB Part Class="Extended Part", LCSC Part Name="主流增强型ARM Cortex-M3 MCU，具有64 KB Flash、72 MHz CPU、电机控制、USB和CAN", Manufacturer=ST(意法半导体), Voltage - Supply=2V~3.6V, ADC (Bit)=12bit, AddInBom=yes, Applications=-, ConvertToPcb=yes, CPU Core=ARM-M3, CPU Maximum Speed=72MHz, Datasheet=https://item.szlcsc.com/datasheet/STM32F103C8T6/9243.html, Device=STM32F103C8T6, FootprintName=LQFP-48_L7.0-W7.0-P0.50-LS9.0-BL, ManufacturerPart=STM32F103C8T6, ModelId=093be70396ff421eb2cdb946d5311efc聨0819f05c4eef4c71ace90d822a990e87, ModelName=LQFP-48_L7.0-W7.0-H1.4-LS9.0-P0.50, ModelTransform=354.331,354.331,0,0,0,0,0,0,0, Number of I/O=37, Program Memory Type=FLASH, Program Storage Size=64KB, Supplier=LCSC, Supplier Footprint=LQFP-48(7x7), SupplierPart=C8734, Symbol=STM32F103C8T6
U2 U3: "插针结构:1x2P;间距:2.54mm;行距:-;圆针/方针:方针;安装方式:直插;排数:单排;总PIN位数:2P;额定电流:3A;额定电压:1kV;配合针长度:6mm;塑高:2.5mm;端接针长度:3mm;触头材质:黄铜;触头镀层:金;工作温度:-40℃~+105℃;颜色:黑色;", Color=黑色, Current Rating=3A, JLCPCB Part Class="Extended Part", LCSC Part Name="1x2P 间距:2.54mm 方针 直插", Manufacturer=hanxia(韩下), Operating Temperature=-40℃~+105℃, Voltage Rating (Max)=1kV, AddInBom=yes, Circluar Pins/Square Pins=方针, Contact Material=黄铜, Contact Plating=金, ConvertToPcb=yes, Datasheet=https://item.szlcsc.com/datasheet/HX%2520PZ2.54-1x2P%2520ZZ/34444548.html, Device="HX PZ2.54-1x2P ZZ", FootprintName=HDR-TH_2P-P2.54-V-M-3, Insulation Height=2.5mm, Length of End Connection Pin=3mm, Length of Mating Pin=6mm, ManufacturerPart="HX PZ2.54-1x2P ZZ", ModelId=c7a9f3c3e6e34627af2bf939e464cb35聨0819f05c4eef4c71ace90d822a990e87, ModelName=HDR-TH_2P-P2.54-M-LI-1X2P, ModelTransform=200,100,0,0,0,0,0,0,-118.11, Mounting Type=直插, Number of Pins=2P, Number of Rows=单排, Pin Structure=1x2P, Pitch=2.54mm, Row Spacing=-, Supplementary Features=-, Supplier=LCSC, Supplier Footprint=插件,P=2.54mm, SupplierPart=C32713268, Symbol="HX PZ2.54-1X2P ZZ"
U4: library part "HX PZ2.54-1x5P ZZ", "插针结构:1x5P;间距:2.54mm;行距:-;圆针/方针:方针;安装方式:直插;排数:单排;总PIN位数:5P;额定电流:3A;额定电压:1kV;配合针长度:6mm;塑高:2.5mm;端接针长度:3mm;触头材质:黄铜;触头镀层:金;工作温度:-40℃~+105℃;颜色:黑色;", Color=黑色, Current Rating=3A, JLCPCB Part Class="Extended Part", LCSC Part Name="1x5P 间距:2.54mm 方针 直插", Manufacturer=hanxia(韩下), Operating Temperature=-40℃~+105℃, Voltage Rating (Max)=1kV, AddInBom=yes, Circluar Pins/Square Pins=方针, Contact Material=黄铜, Contact Plating=金, ConvertToPcb=yes, Datasheet=https://item.szlcsc.com/datasheet/HX%2520PZ2.54-1x5P%2520ZZ/34444551.html, Device="HX PZ2.54-1x5P ZZ", FootprintName=HDR-TH_5P-P2.54-V-M, Insulation Height=2.5mm, Length of End Connection Pin=3mm, Length of Mating Pin=6mm, ManufacturerPart="HX PZ2.54-1x5P ZZ", ModelId=47d466e4a34f4fc5bc626cf773a24dd5聨0819f05c4eef4c71ace90d822a990e87, ModelName=HDR-TH_5P-P2.54-M-LI-1X5P, ModelTransform=499.999,100,0,0,0,0,0,0,-118.11, Mounting Type=直插, Number of Pins=5P, Number of Rows=单排, Pin Structure=1x5P, Pitch=2.54mm, Row Spacing=-, Supplementary Features=-, Supplier=LCSC, Supplier Footprint=插件,P=2.54mm, SupplierPart=C32713271, Symbol="HX PZ2.54-1X5P ZZ"
U5: library part "HX PZ2.54-1x4P ZZ", "插针结构:1x4P;间距:2.54mm;行距:-;圆针/方针:方针;安装方式:直插;排数:单排;总PIN位数:4P;额定电流:3A;额定电压:1kV;配合针长度:6mm;塑高:2.5mm;端接针长度:3mm;触头材质:黄铜;触头镀层:金;工作温度:-40℃~+105℃;颜色:黑色;", Color=黑色, Current Rating=3A, JLCPCB Part Class="Extended Part", LCSC Part Name="1x4P 间距:2.54mm 方针 直插", Manufacturer=hanxia(韩下), Operating Temperature=-40℃~+105℃, Voltage Rating (Max)=1kV, AddInBom=yes, Circluar Pins/Square Pins=方针, Contact Material=黄铜, Contact Plating=金, ConvertToPcb=yes, Datasheet=https://item.szlcsc.com/datasheet/HX%2520PZ2.54-1x4P%2520ZZ/34444550.html, Device="HX PZ2.54-1x4P ZZ", FootprintName=HDR-TH_4P-P2.54-V-M, Insulation Height=2.5mm, Length of End Connection Pin=3mm, Length of Mating Pin=6mm, ManufacturerPart="HX PZ2.54-1x4P ZZ", ModelId=112f4d05e8d64e99ab9a333894bea4f9聨0819f05c4eef4c71ace90d822a990e87, ModelName=HDR-TH_4P-P2.54-M-LI-1X4P, ModelTransform=399.999,104.7242,0,0,0,0,0,0,-118.11, Mounting Type=直插, Number of Pins=4P, Number of Rows=单排, Pin Structure=1x4P, Pitch=2.54mm, Row Spacing=-, Supplementary Features=-, Supplier=LCSC, Supplier Footprint=插件,P=2.54mm, SupplierPart=C32713270, Symbol="HX PZ2.54-1X4P ZZ"
U6: "极性:单向;反向截止电压(Vrwm):5V;钳位电压:14V;峰值脉冲电流(Ipp):4A@8/20us;峰值脉冲功率(Ppp):56W@8/20us;击穿电压:6V;", Clamping Voltage=14V, JLCPCB Part Class="Extended Part", Junction Capacitance=0.6pF, LCSC Part Name="单向ESD 5V截止 峰值浪涌电流：4A@8/20us", Manufacturer=BORN(伯恩半导体), Peak Pulse Current (Ipp)=4A@8/20us, Peak Pulse Power Dissipation (Ppp)=56W@8/20us, Reverse Leakage Current (Ir)=100nA, Reverse Stand-Off Voltage (Vrwm)=5V, Voltage - Breakdown=6V, AddInBom=yes, ConvertToPcb=yes, Datasheet=https://item.szlcsc.com/datasheet/TPD2EUSB30DRTR-N/7109362.html, Device=TPD2EUSB30DRTR-N, FootprintName=SOT-723_L1.2-W0.8-P0.40-LS1.2-BR, level of protection="IEC 61000-4-4；IEC 61000-4-5；IEC 61000-4-2", ManufacturerPart=TPD2EUSB30DRTR-N, ModelId=abccde1e67074d7481274a37cf5c97f0聨0819f05c4eef4c71ace90d822a990e87, ModelName=SOT-723-3P_L1.2-W0.8-H0.6-LS1.2-P0.40, ModelTransform=47.244,47.244,0,180,0,0,0,0,0, Polarity=单向, Supplier=LCSC, Supplier Footprint=SOT-9X3, SupplierPart=C6165119, Symbol=TPD2EUSB30DRTR-N, Type=ESD
U7: "应用功能:收发器;USB协议版本:USB 2.0;数据速率:2Mbps;", Current - Supply=7mA, JLCPCB Part Class="Extended Part", LCSC Part Name=USB转串口芯片, Manufacturer=WCH(南京沁恒), Operating Temperature=-20℃~+70℃, Supply Current (Iq)=50uA, Voltage - Supply=3.3V；5V, AddInBom=yes, Applications Function=收发器, ConvertToPcb=yes, Data Rate=2Mbps, Datasheet=https://item.szlcsc.com/datasheet/CH340C/85852.html, Device=CH340C, FootprintName=SOP-16_L10.0-W3.9-P1.27-LS6.0-BL, ManufacturerPart=CH340C, ModelId=3361a6792abf4a8f8fbca4f1924a67ee聨0819f05c4eef4c71ace90d822a990e87, ModelName=SOP-16_L9.9-W3.9-H1.5-LS6.0-P1.27, ModelTransform=240.39054,393.7,0,90,0,0,0,0,0, Supplier=LCSC, Supplier Footprint=SOP-16, SupplierPart=C84681, Symbol=CH340C, USB Protocol="USB 2.0"
U8: "输出极性:正极;工作电压:6V;输出电压:3.3V;输出电流:600mA;电源纹波抑制比(PSRR):65dB@(1kHz);输出类型:固定;", JLCPCB Part Class="Extended Part", LCSC Part Name="3.3V 600mA 6V", Manufacturer=DIODES(美台), Operating Temperature=-40℃~+85℃@(Ta), Output Current=600mA, Output Voltage=3.3V, Power Supply Rejection Ratio (PSRR)=65dB@(1kHz), standby current=55uA, Voltage - Supply=6V, Voltage Dropout=250mV@(600mA), AddInBom=yes, ConvertToPcb=yes, Datasheet=https://item.szlcsc.com/datasheet/AP2112K-3.3TRG1/52131.html, Device=AP2112K-3.3TRG1, Features=使能控制；短路保护；输出放电；过流保护；热关断, FootprintName=SOT-25-5_L2.9-W1.6-P0.95-LS2.8-BL, ManufacturerPart=AP2112K-3.3TRG1, ModelId=c0f94ce67e934acfa3fe33a5b88e2836聨0819f05c4eef4c71ace90d822a990e87, ModelName=SOT-25-5_L2.9-W1.6-P0.95-LS2.8-BL, ModelTransform=114.173,110.236,0,0,0,0,0,0,0, Noise=50uVrms, Number of Outputs=1, Output Configuration=正极, Output Type=固定, Supplier=LCSC, Supplier Footprint=SOT-25-5, SupplierPart=C51118, Symbol=AP2112K-3.3TRG1
USB1: "连接器类型:Type-C;协议标准:-;公母:母;安装方式:卧贴;触点数量:16P;端口数量:1;额定电流 - 电源:3A;工作温度:-25℃~+85℃;", Current Rating-Power=3A, Detection color=黑色, JLCPCB Part Class="Extended Part", LCSC Part Name="Type-C 母 卧贴", Manufacturer="SHOU HAN(首韩)", Operating Temperature=-25℃~+85℃, Voltage Rating=5V, AddInBom=yes, Center Height=-, Connect-Disconnect Life=1万次, Connector Type=Type-C, ConvertToPcb=yes, Datasheet=https://item.szlcsc.com/datasheet/TYPE-C%252016PIN%25202MD(073)/2901843.html, Device="TYPE-C 16PIN 2MD(073)", FootprintName=USB-C-SMD_TYPE-C-16PIN-2MD-073, Gender=母, Length=-, ManufacturerPart="TYPE-C 16PIN 2MD(073)", ModelId=3a41b9ec9b654a0fad4d118405ec6290聨0819f05c4eef4c71ace90d822a990e87, ModelName=USB-C-SMD_TYPE-C-6PIN-2MD-073, ModelTransform=351.9678,298.4246,0,0,0,0,0,-47.244,-35.433, Mounting Type=卧贴, Number of Contacts=16P, Number of Ports=1, Protocol Standard=-, Supplementary Features=-, Supplier=LCSC, Supplier Footprint=SMD, SupplierPart=C2765186, Symbol="TYPE-C 16PIN 2MD(073)"
X1: library part XC53G2-8.000-F12NJHP, "晶振类型:贴片晶振;频率:8MHz;常温频差:±10ppm;负载电容:12pF;频率稳定度:±30ppm;", Equivalent Series Resistance(ESR)=80Ω, Frequency Stability=±30ppm, JLCPCB Part Class="Extended Part", LCSC Part Name="5032 2P glass 8MHz 12pF ±10ppm -20℃~+70℃(±30ppm)", Load Capacitance=12pF, Manufacturer=HCI(杭晶), Normal temperature Frequency Tolerance=±10ppm, Operating Temperature=-20℃~+70℃, AddInBom=yes, ConvertToPcb=yes, Datasheet=https://item.szlcsc.com/datasheet/XC53G2-8.000-F12NJHP/3026543.html, Device=XC53G2-8.000-F12NJHP, FootprintName=CRYSTAL-SMD_L5.0-W3.2, ManufacturerPart=XC53G2-8.000-F12NJHP, ModelId=d7c39c66443246ff83c2003c1e1eb6f1聨0819f05c4eef4c71ace90d822a990e87, ModelName=CRYSTAL-SMD_L5.0-W3.2, ModelTransform=196.85,125.984,0,0,0,0,0,0,0, Supplier=LCSC, Supplier Footprint=SMD5032-2P, SupplierPart=C2842269, Symbol=XC53G2-8.000-F12NJHP, Type=贴片晶振

## Free pads (board coordinates)
  round 60 hole 106.3 unplated: 1(120,120) 1(125,2235) 1(2220,2235) 1(2225,135)

## Via types
v1: diameter 22, hole 12, Top Layer to Bottom Layer, tented both sides, 135 vias
v2: diameter 15.75, hole 7.87, Top Layer to Bottom Layer, tented both sides, 13 vias

## Nets (pads, with @x,y where several pads share a name; then routed paths per layer and width w, separated by ;. In a path a pad name is that pad's centre, name@x,y a point inside that pad or via, vN(x,y) a via of type N, cw(c..) or ccw(c..) an arc to the next point about the centre after c; other vN are vias at no path point)
3.3V: C1.2 C2.1 C5.1 C9.2 C12.2 C13.2 C14.2 C16.1 C17.1 H2.1 H4.1 H5.1 H5.3 R4.2 R5.1 R18.2 R19.2 R20.2 TP_2.1 U1.1 U1.24 U1.36 U1.48 U5.1 U7.4 U7.16 U8.5 | length 7864.3
  Top Layer w10: U1.48@1449,1261 U1.48
  Top Layer w15: 138.6,925 H5.3 357.6,772.4 557.4,772.4 ; C12.2@557.4,530 557.4,772.4 ; C12.2 U7.4 ; v1(790,1255) 790,1085 866.35,1008.65 ; 863.62,1005.91 857.6,999.89 857.6,772.4 ; U7.16 C14.2@931.75,680 ; 870,1005 1054.6,1005 1063.39,1013.79 1063.39,1044.4 U1.24 ; C14.2@934.15,683.25 934.15,695.85 857.6,772.4 ; C14.2@934.57,682.82 C14.2 ; C13.2 943.7,561.3 943.7,673.7 C14.2 ; v1(1110,1565) 1111.34,1566.34 1181.74,1566.34 R5.1 ; U1.36 1413.4,939.65 1433.05,920 C5.1 1498.09,920 ; U1.48@1449,1261 1413.4,1296.6 U1.1 1413.4,1339.85 1423.55,1350 1615,1350 1865,1600 1865,1870 1930,1935 H2.1 ; U1.48@1494.55,1260 C2.1 1529.9,1259.9 1529.9,1225.1 v2(1530,1225) ; C1.2@1529.04,950.96 v2(1529.04,1000.89) ; 1590,765 1265,765 1240,740 1005.45,740 942.4,676.95 C14.2 ; R18.2 1885.3,300 2031.21,300 2040,308.79 2040,415 ; C17.1 2022.4,482.6 2040,465 2040,415 ; R20.2 2095.5,725 2140.5,770 2280,770 ; H4.1 2240,995 2280,955 2280,770 ; 557.4,772.4 857.6,772.4 ; 2040,415 2065,390 2195,390 U5.1 2280,475 2280,770
  Top Layer w20: C1.2@1529.04,950.96 1529.04,947.09 1524.25,942.3 1520.39,942.3 1498.09,920 1520,898.09 1520,835 1590,765 1682.5,672.5 ; R4.2 1718.9,740.7 1682.5,704.3 1682.5,672.5 ; TP_2.1 1882.47,642.53 1937.47,642.53 1966.72,613.28 1966.72,538.28 1970,535 ; 1958.7,546.3 1808.7,546.3 1682.5,672.5 ; 1970,512.5 1970,535 ; C17.1 1985,492.6 1985,535 1970,535
  Bottom Layer w15: v1(790,1255) 1098.66,1563.66 1108.66,1563.66 v1(1110,1565) ; v2(1529.04,1000.89) 1529.04,1223.84 1530,1224.8 v2(1530,1225)
+5V_SYS: C15.1 H5.10 R17.1 SW3.2 TP_1.1 U8.1 | length 1885.9
  Top Layer w15: H5.10 680,850 v1(830,850) ; v1(1050,705) 1050,655 1135,570 1295,570 ; TP_1.1 1305,580 1295,570 ; R17.1 1619.6,255.4 1535,340 SW3.2 1295,350 1295,570
  Bottom Layer w15: v1(830,850) 1041.21,850 1050,841.21 v1(1050,705)
ADC12_IN0: C10.2 D3.3 R10.1 TP_ADC1.1 U1.10 | length 1570.4
  Top Layer w6: U1.10 1235.42,1320.88 1235.42,1379.58 1228.51,1386.49 1163.51,1386.49 1025,1525 1025,1690 1050,1715 1185,1715 1210,1740 1210,1825 1230,1845 1285,1845 1340,1790 1478.33,1790 1493.33,1775 D3.3 1555.6,1806.05 1667.6,1918.05 C10.2 ; R10.1 1720,1974.35 1667.6,1921.95 C10.2 ; TP_ADC1.1 1695,1920 C10.2
ADC12_IN1: C11.2 D4.3 R11.1 TP_ADC2.1 U1.11 | length 1105.6
  Top Layer w6: U1.11 1216.6,1353.4 1200,1370 1145,1370 1005,1510 1005,1715 1060,1770 D4.3 1170,1850.45 1242.6,1923.05 C11.2 ; R11.1 1305.4,2008.9 1244.69,1948.19 1244.69,1927.09 C11.2 ; TP_ADC2.1 1300,1925 C11.2
GATE1: Q1.1 R1.2 R3.2 TP_GATE1.1 | length 247.3
  Top Layer w6: Q1.1 382.6,1712.6 R1.2 ; TP_GATE1.1 R1.2 ; R3.2 R1.2
GATE2: Q2.1 R6.2 R7.2 TP_GATE2.1 | length 231.3
  Top Layer w6: Q2.1 R6.2@390.34,1307.6 ; R6.2@388.85,1317.15 R6.2@390,1316 ; TP_GATE2.1 R6.2@390.34,1307.6 ; R6.2@392.85,1307.85 R6.2@395,1310 ; R7.2@458.55,1312.15 R7.2 R6.2 390.34,1310.36 R6.2@390.34,1307.6
GND: C1.1 C2.2 C3.1 C4.1 C5.2 C6.1 C7.1 C8.1 C9.1 C10.1 C11.1 C12.1 C13.1 C14.1 C15.2 C16.2 C17.2 C18.1 D3.1 D4.1 D5.2 H1.3 H2.3 H3.3 H4.5 H5.2 H5.4 H6.1 LED2.2 Q1.2 Q2.2 R2.2 R3.1 R7.1 R12.2 R13.2 R14.1 R15.1 R16.1 R21.1 SW1.2 SW2.1 TP_GND1.1 U1.8 U1.23 U1.35 U1.47 U2.2 U3.2 U4.1 U5.2 U6.3 U7.1 U7.15 U8.2 USB1.A1B12 USB1.B1A12 | length 3261.9
  Top Layer w10: v1@1275,1270 v1(1275.6,1270.6) U1.8 ; v1(1385,935) 1385,938.25 1393.59,946.83 1393.59,985.29 U1.35
  Top Layer w15: v1(95,695) C18.1 155,695.6 v1(155,755) ; v1(265,1785) 296.3,1785 Q1.2 ; USB1.B1A12 284.3,329 296.96,316.34 308.66,316.34 v1(310,315) ; USB1.A1B12 v1(319,581) v1@320,580 ; v1(298.7,1758.7) Q1.2 ; v1(304.3,1355.7) Q2.2 ; v1@305,1410 v1(304.3,1409.3) Q2.2 ; v1@335,1783.11 v1(335,1785) 333.8,1786.2 299.9,1786.2 Q1.2 ; v1(340,1380) 306.7,1380 Q2.2 ; v1(400,650) 399.35,650.65 399.35,694.35 R15.1 403.7,700 v1(455,700) ; v1(405,575) 404.8,574.8 404.8,535.2 R14.1 v1(440,535) ; U6.3 v1(440,455) ; R16.1 v1(480,380) ; R7.1 v1(505,1370) ; v1(465,530) C12.1 502.4,570.71 500,573.11 v1(500,575) ; R3.1 v1(519.3,1774.3) v1@520,1775 ; v1(585,55) D5.2 v1(639.4,115.6) v1@640,115 ; U7.1 v1(700,680) ; v1(800,630) U7.15 ; v1(890,1125) R21.1 ; v1(908.3,2055) SW2.1 ; v1(945,459.1) C13.1 945.1,504.9 989.9,504.9 v1(990,505) ; v1(955,1050) C9.1 ; v1(974.3,1925) C6.1 v1(1020,1970) ; v1(997.6,629.3) C14.1 ; U1.23 1194.1,1064.1 v1(1195,1065) ; v1(1140,1500) C8.1 ; v1(1141.7,1925) C11.1 1187.4,1965.71 1185,1968.11 v1(1185,1970) ; v1(1160,1435) 1161.89,1435 1166.89,1430 C7.1 ; v1@1245,1679.3 v1(1245,1680) D4.1@1245,1725 ; v1(1250,2080) R13.2 ; v1(1417.6,1620.51) C4.1 v1(1445,1585) ; v1(1425,1240) 1425.9,1239.1 U1.47@1460,1239.1 ; v1(1435,815) C5.2 v1(1484.8,864.8) ; v1(1480,1585) C3.1 1512.4,1620.71 1510,1623.11 v1(1510,1625) ; v1(1566.7,1920) C10.1 1612.4,1960.51 1615,1963.11 v1(1615,1965) ; v1(1585,985) 1585.2,984.8 C1.1 ; C2.2 v1(1630.7,1260) ; v1(1585.2,904.3) C1.1 ; v1(1595,425) 1595.1,424.9 1639.9,424.9 C15.2 1645.2,430 1660,430 v1(1667.62,437.62) 1675.25,445.25 1699.05,445.25 U8.2 ; v1(1599.6,2125) R12.2 ; v1(1625,950) C1.1 ; D3.1 1692.6,1737.6 v1(1695,1740) ; LED2.2 1743.4,96.6 v1(1746.7,93.3) v1@1750,90 ; R2.2 v1(1848.97,1192.19) ; v1(1880,385) C16.2 1881.95,427.4 v1(1918.46,390.89) v1(1936.54,390.89) 1973.05,427.4 C17.2 v1(1975,380) ; v1(1975,905) TP_GND1.1 ; SW1.2 v1(2015,1860) ; v1(2025,855) TP_GND1.1 ; v1(2025,955) TP_GND1.1 ; v1(2085,905) TP_GND1.1
  other v1: 1965,165 2010,165 1965,210 2010,210 1750,285 1805,290 1755,340 1795,340 1610,355 965,370 1010,370 1555,385 345,415 965,415 1010,415 375,500 40,770 95,770 255,770 140,825 190,825 35,830 90,830 35,1095 125,1100 125,1185 50,1190 570,1230 615,1230 570,1275 615,1275 2215,1595 2260,1595 2215,1640 2260,1640 2020,2030 2065,2030 2020,2075 2065,2075 1985,2145 2005,2250 2050,2250 2005,2295 2050,2295
I2C1_SCL: R19.1 U1.42 U5.3 | length 1212.8
  Top Layer w6: U1.42 1672.1,1142.9 1845,970 1845,800 2050,595 U5.3 2200,584.3 2096.1,480.4 R19.1
I2C1_SDA: R20.1 U1.43 U5.4 | length 1048
  Top Layer w6: U1.43 1682.4,1162.6 1865,980 1865,805 2004.3,665.7 R20.1 2095.5,665.7 2124.8,695 U5.4
LED_USER: LED1.2 U1.41 | length 437.6
  Top Layer w6: U1.41 1656.8,1123.2 1765,1015 1765,1000 1721.59,956.59 1721.59,934.99 LED1.2
MCU_RX: U1.31 U7.2 | length 882
  Top Layer w6: U7.2 735,630 825,720 862.75,720 v1(863.88,718.88) ; v1(925,765) 1195,765 1315,885 U1.31
  Bottom Layer w6: v1(863.88,718.88) 866.38,718.88 907.49,759.99 915.66,759.99 920.67,765 v1(925,765)
MCU_TX: U1.30 U7.3 | length 1041.4
  Top Layer w6: U7.3 625.35,580 617.96,587.39 617.96,600 585,632.96 585,715 610,740 846.22,740 v1(848.5,742.28) ; v1(905,790) 1185,790 1295.3,900.3 U1.30
  Bottom Layer w6: v1(848.5,742.28) 851.56,745.34 865.34,745.34 894.36,774.36 894.36,775.03 905,785.67 v1(905,790)
MOS_CTRL1: R1.1 U1.18 | length 1214.3
  Top Layer w6: R1.1 385,1805 400,1820 560,1820 570,1810 570,1725 715,1580 715,1405 885,1235 1010,1235 1082.4,1162.6 U1.18
MOS_CTRL2: R6.1 U1.19 | length 919.1
  Top Layer w6: R6.1 390,1410 415,1435 645,1435 870,1210 1012.6,1210 1079.7,1142.9 U1.19
MOS_OUT1: D1.2 H1.2 Q1.3 TP_OUT1.1 | length 556.6
  Top Layer w20: H1.2 197.2,1752.8 217.2,1752.8 Q1.3 220,1828.28 231.72,1840 340,1840 354.14,1854.14 354.14,1872.54 D1.2 405,1926.6 TP_OUT1.1
MOS_OUT2: D2.2 H3.2 Q2.3 TP_OUT2.1 | length 559.1
  Top Layer w20: H3.2 187.2,1347.8 222.8,1347.8 Q2.3 225.6,1410.6 255,1440 320,1440 D2.2 TP_OUT2.1
NetC3_2: C3.2 U1.5 X1.1 | length 469.8
  Top Layer w6: U1.5 1334.7,1369.7 1340,1375 1525,1375 1543.68,1393.68 X1.1 1567.6,1489.33 C3.2
NetC4_2: C4.2 U1.6 X1.2 | length 300.1
  Top Layer w6: U1.6 1315,1388.28 1382.28,1455.56 1382.28,1460.48 1364.8,1477.97 C4.2@1364.8,1585
NetH2_2: H2.2 R2.1 U1.44 | length 1279.5
  Top Layer w6: U1.44 1733.98,1182.2 R2.1 1743.97,1238.97 1780,1275 2000,1275 2020,1295 2020,1370.29 v2(2020.42,1370.71) ; v1(2020,1420) 2145,1545 2145,1785 2195,1835 H2.2
  Bottom Layer w6: v1(2020,1420) 2020.42,1419.58 v2(2020.42,1370.71)
NetLED1_1: LED1.1 R4.1 | length 66.5
  Top Layer w6: R4.1 LED1.1
NetLED2_1: LED2.1 R18.1 | length 234.8
  Top Layer w6: LED2.1 1807,163.5 1878.9,235.4 R18.1
NetR8_1: R8.1 U2.1 | length 180
  Top Layer w6: U2.1 1810,2210.7 1894.6,2126.1 R8.1
NetR8_2: R8.2 R10.2 R12.1 | length 268.9
  Top Layer w6: R12.1 R8.2 1835.3,2123.9 1779.3,2067.9 R10.2
NetR9_1: R9.1 U3.1 | length 161.4
  Top Layer w6: U3.1 1410,2165.7 1449.6,2126.1 R9.1
NetR9_2: R9.2 R11.2 R13.1 | length 206.6
  Top Layer w6: R13.1 R9.2 1390.3,2036.7 1364.7,2011.1 R11.2
NetR14_2: R14.2 USB1.A5 | length 85.2
  Top Layer w6: USB1.A5 315.6,504.2 345.3,533.9 R14.2
NetR16_2: R16.2 USB1.B5 | length 99.3
  Top Layer w6: USB1.B5 359.6,386.1 R16.2 R16.2@362.49,376.79
NetR17_2: R17.2 U8.3 | length 115.4
  Top Layer w6: R17.2 1675,393.3 1694.3,412.6 U8.3
NetR21_2: R21.2 U1.20 | length 143.5
  Top Layer w6: R21.2 996.8,1123.2 U1.20
NetSW1_1: SW1.1 U1.45 | length 783
  Top Layer w6: U1.45 1666.9,1201.9 1780,1315 v2(1780,1375) ; v2(1780,1420) 1781.87,1421.87 1790.47,1421.87 2002.6,1634 SW1.1
  Bottom Layer w6: v2(1780,1375) v2(1780,1420)
NRST: C6.2 H4.4 SW2.2 U1.7 | length 2214.2
  Top Layer w6: v1(925,1505) 1140,1290 1170,1290 1215,1245 1315,1245 ; v1(970,1550) 970,1800 1071.81,1901.81 1071.81,1921.61 C6.2 1075.2,1926.95 1087.95,1939.7 1109.7,1939.7 1126,1956 SW2.2 ; U1.7 1295.3,1279.46 1295,1279.16 1295,1265 1315,1245 ; v2(1405,1265) 1378.09,1265 1358.09,1245 1315,1245 ; v2(1450,1300) 1625,1300 1720,1395 H4.4
  Bottom Layer w6: v1(925,1505) v1(970,1550) ; v2(1405,1265) 1438.13,1298.13 1448.13,1298.13 v2(1450,1300)
PA8: H5.5 U1.29 | length 1161.9
  Top Layer w6: H5.5 342.58,887.42 342.58,835.93 368.51,810 550,810 560,820 v1(830.5,820) ; v1(910,820) 1180,820 1275.6,915.6 U1.29
  Bottom Layer w6: v1(830.5,820) v1(910,820)
PB12: H5.6 U1.25 | length 1088.1
  Top Layer w6: H5.6 305,1095 350,1140 665,1140 v1(830,975) ; v1(885,970) 1010,970 1030,950 1185.75,950 1196.9,961.15 U1.25
  Bottom Layer w6: v1(830,975) 832.5,972.5 882.5,972.5 v1(885,970)
PB13: H5.7 U1.26 | length 1177
  Top Layer w6: H5.7 360,970 360,1085 390,1115 627.15,1115 802.15,940 v1(830,940) ; v1(885,940) 1005,940 1020,925 1200,925 1216.6,941.6 U1.26
  Bottom Layer w6: v1(830,940) v1(885,940)
PB14: H5.8 U1.27 | length 1024.4
  Top Layer w6: H5.8 416.52,1036.52 416.52,1061.52 450,1095 590.35,1095 778.23,907.12 827.12,907.12 v1(830,910) ; v1(885,910) 887,908 1223,908 1236.3,921.3 U1.27
  Bottom Layer w6: v1(830,910) v1(885,910)
PB15: H5.9 U1.28 | length 1127.6
  Top Layer w6: H5.9 455,975 455,1055 475,1075 550,1075 745.85,879.15 v1(829.15,879.15) ; v1(885,877) 888,880 1220,880 1256,916 U1.28
  Bottom Layer w6: v1(829.15,879.15) 830.22,878.07 883.93,878.07 v1(885,877)
SHIELD: C18.2 R15.2 USB1.13 USB1.14 | length 673
  Top Layer w15: USB1.13@250.55,626.55 251.8,625.3 86.5,625.3 86.5,284.7 USB1.14@251.8,284.7
SPI1_CS: U1.14 U4.2 | length 1255
  Top Layer w6: U4.2 675,2259.97 700,2234.97 700,1760 820,1640 820,1500 1000,1320 1034.33,1320 1113.03,1241.3 U1.14
SPI1_MISO: U1.16 U4.4 | length 1412.8
  Top Layer w6: U4.4 475,2225 640,2060 640,1745 775,1610 775,1445 940,1280 1020,1280 1098.1,1201.9 U1.16
SPI1_MOSI: U1.17 U4.5 | length 1494.6
  Top Layer w6: U4.5 615,2030 615,1740 750,1605 750,1415 905,1260 1010,1260 1087.8,1182.2 U1.17
SPI1_SCK: U1.15 U4.3 | length 1336.8
  Top Layer w6: U4.3 575,2175 670,2080 670,1755 800,1625 800,1465 960,1305 1025,1305 1107.52,1222.48 1136.92,1222.48 U1.15
SWCLK: H4.3 U1.37 | length 887.9
  Top Layer w6: U1.37 1473.1,1045 1595,1045 1615,1025 1660,1025 v2(1690,1055) ; v2(1755,1120) 1757.64,1120 1772.64,1135 2080,1135 H4.3
  Bottom Layer w6: v2(1690,1055) v2(1755,1120)
SWDIO: H4.2 U1.34 | length 993.3
  Top Layer w6: U1.34 1374.98,986.28 1374.98,1015.94 1382.11,1023.07 1586.93,1023.07 1615,995 1685,995 v2(1715,1025) ; v2(1785,1095) 2140,1095 H4.2
  Bottom Layer w6: v2(1715,1025) v2(1785,1095)
USART2_RX: H6.3 U1.13 | length 1233.3
  Top Layer w6: H6.3 795,2105 795,1740 855,1680 855,1520 1114,1261 U1.13
USART2_TX: H6.2 U1.12 | length 1242.3